# Altium PCB OSPLC2_2_STATUS.PcbDoc
Units mm, origin at the board's own origin, x right, y up, seen from the top; angles counter-clockwise.
Board outline 155 x 42 mm, 2 copper layers (Top Layer, Bottom Layer); 57 components, 59 nets, 160 pads, 36 vias.
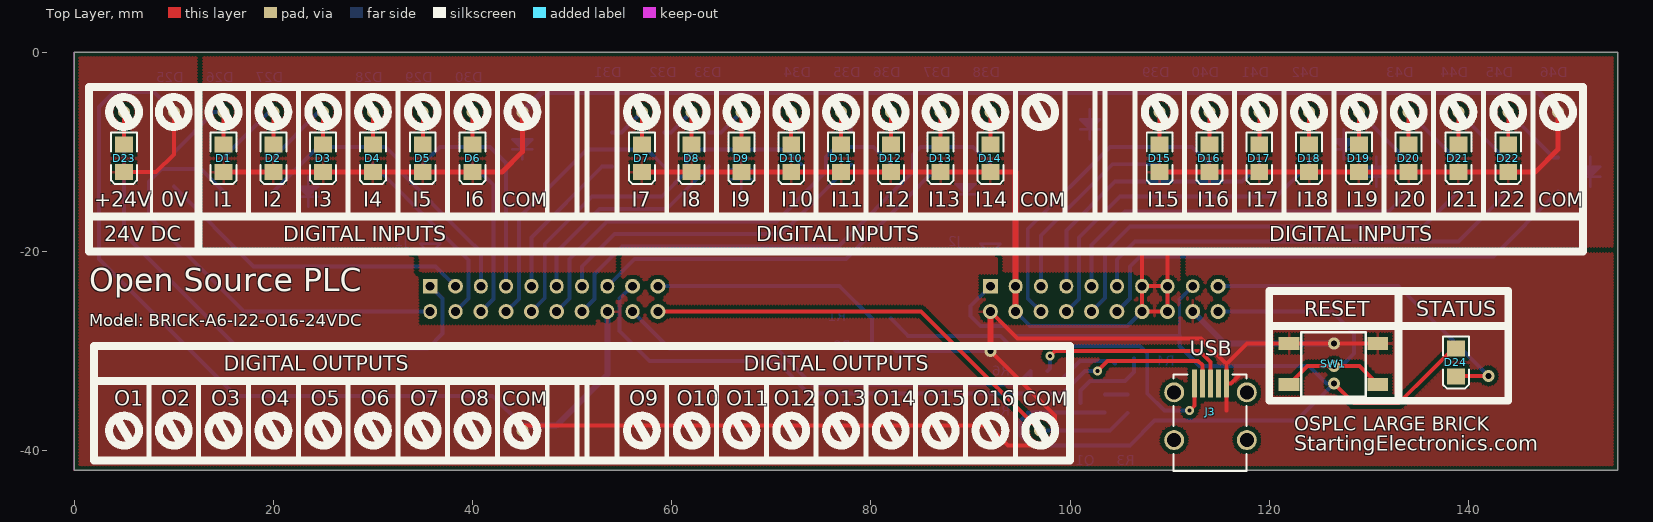
[diagram p0: Top Layer view]
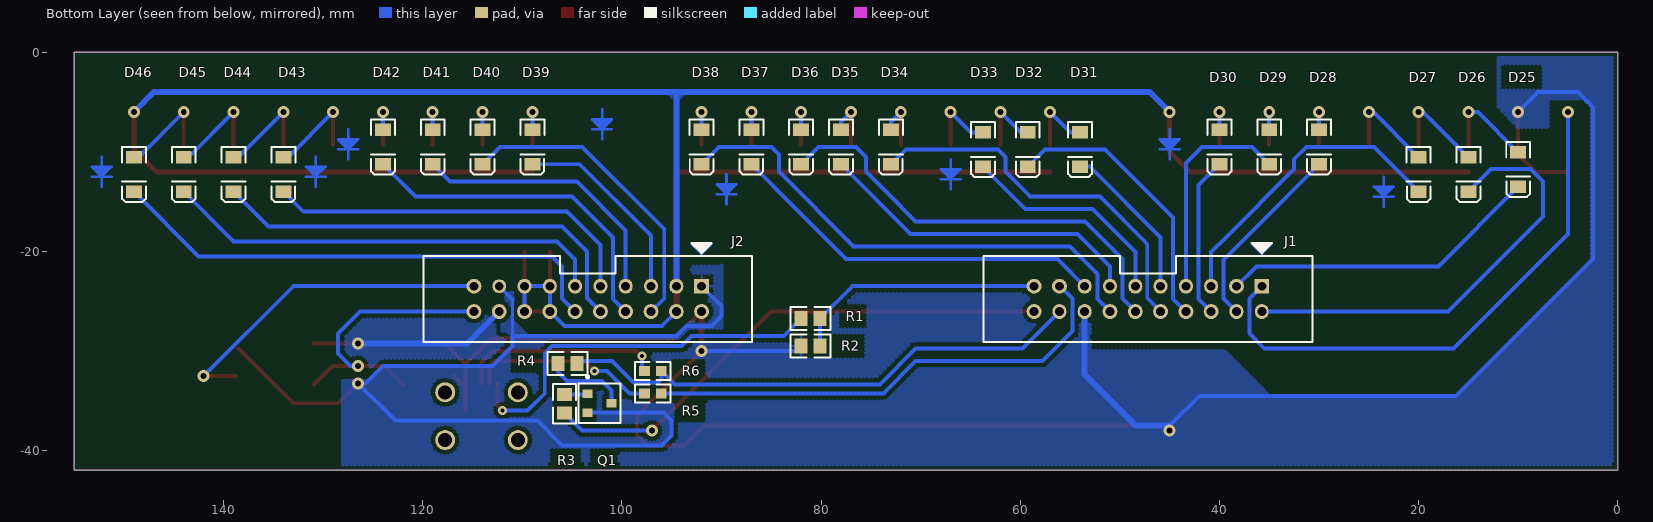
[diagram p1: Bottom Layer view, seen from below]

## Layer stack, top to bottom
Top Layer: signal copper 0.0356
Dielectric: dielectric 0.32, FR-4, Dk 4.8
Bottom Layer: signal copper 0.0356

## Board outline
0,-42 155,-42 155,0 0,0

## Design rules (kind name [scope] priority, off if disabled: settings)
Clearance [All] p1: gap=0.3
ComponentClearance [All] p1: gap=0.254 collisioncheckmode=0
HoleSize [All] p1: absolutevalues=TRUE maxlimit=5 minlimit=0.3 maxpercent=80.000 minpercent=20.000
PolygonConnect [All] p1: connectstyle=Relief reliefconductorwidth=0.254 reliefentries=4 polygonreliefangle="90 Angle"
RoutingLayers [All] p1: top layer=Horizontal bottom layer=Vertical
RoutingVias [All] p1: holewidth=0.6 width=1.2 viastyle="Through Hole" minholewidth=0.3 minwidth=0.6 maxholewidth=2 maxwidth=5
SolderMaskExpansion [All] p1: expansion=0.102
TestPointUsage [All] p1: valid=0 allowmultiple=FALSE
Testpoint [All] p1: side=15 testpointundercomponent=TRUE minsize=1.016 maxsize=2.54 preferedsize=1.524 minholesize=0 maxholesize=1.016 preferedholesize=0.813 testpointgrid=0.025 style=1023 order=1234567890
Width [All] p1: maxlimit=5 minlimit=0.2 preferedwidth=0.2 toplayer_prefwidth=0.4 bottomlayer_prefwidth=0.4 minimp=50.000000 maximp=50.000000 favimp=50.000000
15 further rules are at their usual default settings.

## Components (designator, comment, footprint, x,y, rotation, side; value= is the part's Value field where it differs from the comment)
D1 "LED" 1206_LED 15,-9.25 r270 top
D2 "LED" 1206_LED 20,-9.25 r270 top
D3 "LED" 1206_LED 25,-9.25 r270 top
D4 "LED" 1206_LED 30,-9.25 r270 top
D5 "LED" 1206_LED 35,-9.25 r270 top
D6 "LED" 1206_LED 40,-9.25 r270 top
D7 "LED" 1206_LED 57,-9.25 r270 top
D8 "LED" 1206_LED 62,-9.25 r270 top
D9 "LED" 1206_LED 67,-9.25 r270 top
D10 "LED" 1206_LED 72,-9.25 r270 top
D11 "LED" 1206_LED 77,-9.25 r270 top
D12 "LED" 1206_LED 82,-9.25 r270 top
D13 "LED" 1206_LED 87,-9.25 r270 top
D14 "LED" 1206_LED 92,-9.25 r270 top
D15 "LED" 1206_LED 109,-9.25 r270 top
D16 "LED" 1206_LED 114,-9.25 r270 top
D17 "LED" 1206_LED 119,-9.25 r270 top
D18 "LED" 1206_LED 124,-9.25 r270 top
D19 "LED" 1206_LED 129,-9.25 r270 top
D20 "LED" 1206_LED 134,-9.25 r270 top
D21 "LED" 1206_LED 139,-9.25 r270 top
D22 "LED" 1206_LED 144,-9.25 r270 top
D23 "LED" 1206_LED 5,-9.25 r270 top
D24 "LED" 1206_LED 138.75,-29.75 r270 top
D25 "8v2" MELF-R2/X1.6 10,-13.5 r0 bottom
D26 "8v2" MELF-R2/X1.6 15,-14 r0 bottom
D27 "8v2" MELF-R2/X1.6 20,-14 r0 bottom
D28 "8v2" MELF-R2/X1.6 30,-11.25 r0 bottom
D29 "8v2" MELF-R2/X1.6 35,-11.25 r0 bottom
D30 "8v2" MELF-R2/X1.6 40,-11.25 r0 bottom
D31 "8v2" MELF-R2/X1.6 54,-11.5 r0 bottom
D32 "8v2" MELF-R2/X1.6 59.25,-11.5 r0 bottom
D33 "8v2" MELF-R2/X1.6 63.75,-11.5 r0 bottom
D34 "8v2" MELF-R2/X1.6 73,-11.25 r0 bottom
D35 "8v2" MELF-R2/X1.6 78,-11.25 r0 bottom
D36 "8v2" MELF-R2/X1.6 82,-11.25 r0 bottom
D37 "8v2" MELF-R2/X1.6 87,-11.25 r0 bottom
D38 "8v2" MELF-R2/X1.6 92,-11.25 r0 bottom
D39 "8v2" MELF-R2/X1.6 109,-11.25 r0 bottom
D40 "8v2" MELF-R2/X1.6 114,-11.25 r0 bottom
D41 "8v2" MELF-R2/X1.6 119,-11.25 r0 bottom
D42 "8v2" MELF-R2/X1.6 124,-11.25 r0 bottom
D43 "8v2" MELF-R2/X1.6 134,-14 r0 bottom
D44 "8v2" MELF-R2/X1.6 139,-14 r0 bottom
D45 "8v2" MELF-R2/X1.6 144,-14 r0 bottom
D46 "8v2" MELF-R2/X1.6 149,-14 r0 bottom
J1 "IDC20M" IDC_20M_BOX#1 35.75,-23.5 r180 bottom
J2 "IDC20M" IDC_20M_BOX#2 92,-23.5 r180 bottom
J3 "USB-MINI-B" USB_MINI 112.5,-33.25 r0 top
Q1 "BC807-40" SO-G3/Y1 102.25,-35.25 r270 bottom
R1 "0805" 0805 82,-26.75 r180 bottom
R2 "0805" 0805 82,-29.5 r180 bottom
R3 "0805" 0805 105.75,-36.25 r90 bottom
R4 "0805" 0805 104.5,-31.25 r0 bottom
R5 "0603" 0603 97.75,-34.25 r180 bottom
R6 "0603" 0603 97.75,-32 r180 bottom
SW1 "DTSMW-66" DTSMW-66 122,-29.25 r0 top

## Footprints (in the part's own frame and the unit in brackets; to place one, negate y for a bottom-side part, rotate by r counter-clockwise, add the part's x,y. Pads: shape width x height; smd on the part's side, far side on the other; paste and mask are expansions set on the pad)
0603 [mm]
  rect 1.1x1 smd: 1(0,0) 2(1.7,0)
  silkscreen extent -0.95,-0.9 2.65,0.9
0805 [mm]
  rect 1.3x1.5 smd: 1(0,0) 2(1.9,0)
  silkscreen extent -1.05,-1.15 2.95,1.15
1206_LED [mm]
  rect 1.6x1.8 smd: 1(0,0) 2(2.8,0)
  silkscreen extent -1.2,-1.3 4,1.3
DTSMW-66 [mm] "Diptronics SMT switch, DTSMW-66"
  rect 2.1x1.3 smd: 1(0,0) 2(8.9,0) 3(0,-4.1) 4(8.9,-4.1)
  silkscreen extent 1.2,-5.35 7.7,1.15
IDC_20M_BOX#1 [mm]
  rect 1.5x1.5 hole 0.9: 1(0,0)
  oval 1.4x1.5 hole 0.9: 2(0,-2.54) 4(-2.54,-2.54) 5(-5.08,0) 7(-7.62,0) 9(-10.16,0) 11(-12.7,0) 13(-15.24,0) 15(-17.78,0) 16(-17.78,-2.54) 18(-20.32,-2.54)
  round 1.5 hole 0.9: 3(-2.54,0) 6(-5.08,-2.54) 8(-7.62,-2.54) 10(-10.16,-2.54) 12(-12.7,-2.54) 14(-15.24,-2.54) 17(-20.32,0) 19(-22.86,0) 20(-22.86,-2.54)
  silkscreen extent -27.94,-5.59 5.08,4.38
IDC_20M_BOX#2 [mm]
  rect 1.5x1.5 hole 0.9: 1(0,0)
  round 1.5 hole 0.9: 2(0,-2.54) 4(-2.54,-2.54) 6(-5.08,-2.54) 8(-7.62,-2.54) 10(-10.16,-2.54) 12(-12.7,-2.54) 14(-15.24,-2.54) 16(-17.78,-2.54) 18(-20.32,-2.54) 19(-22.86,0) 20(-22.86,-2.54)
  oval 1.4x1.5 hole 0.9: 3(-2.54,0) 5(-5.08,0) 7(-7.62,0) 9(-10.16,0) 11(-12.7,0) 13(-15.24,0) 15(-17.78,0)
  round 1.4 hole 0.9: 17(-20.32,0)
  silkscreen extent -27.94,-5.59 5.08,4.38
MELF-R2/X1.6 [mm] "Mini Melf Diode"
  rect 1.6x1.25 smd: 1(0,-3.45) 2(0,0)
  silkscreen extent -1.2,-4.47 1.2,1.03
SO-G3/Y1 [mm]
  rect 0.85x1 smd: 1(-0.95,-1.2) 2(0.95,-1.2) 3(0,1.2)
  silkscreen extent -2.77,-2.1 2,2.1
USB_MINI [mm] "Mini USB Connector"
  rect 0.5x2.8 smd: 1(0,0) 2(0.8,0) 3(1.6,0) 4(2.4,0) 5(3.2,0)
  round 2 hole 1.4: 6(-2.05,-0.9) 7(5.25,-0.9) 8(-2.05,-5.7) 9(5.25,-5.7)
  silkscreen extent -2.1,-8.8 5.2,0.9

## Part data
D1 D2 D3 D4 D5 D6 D7 D8 D9 D10 D11 D12 D13 D14 D15 D16 D17 D18 D19 D20 D21 D22 D23 D24: library part LED_1206, "1206 footpring LED"
D25 D26 D27 D28 D29 D30 D31 D32 D33 D34 D35 D36 D37 D38 D39 D40 D41 D42 D43 D44 D45 D46: library part BZV55C, "SMT Zenter Diode"
J1 J2: library part IDC_20M, "20 pin IDC male connector, vertical, box"
J3: "USB Miniature Type B Connector"
Q1: "PNP General Purpose Amplifier"
R1 R2 R3 R4: library part RES_0805, "0805 footprint resistor"
R5 R6: library part RES_0603, "0603 footprint resistor"
SW1: library part PB_SWITCH_DTSMW-66, "Diptronics SMT Tactile Push Button Switch"

## Via types
v1: diameter 1.2, hole 0.6, Top Layer to Bottom Layer, 33 vias
v2: diameter 0.9, hole 0.4, Top Layer to Bottom Layer, 3 vias

## Nets (pads, with @x,y where several pads share a name; then routed paths per layer and width w, separated by ;. In a path a pad name is that pad's centre, name@x,y a point inside that pad or via, vN(x,y) a via of type N, cw(c..) or ccw(c..) an arc to the next point about the centre after c; other vN are vias at no path point)
DDM: J1.17 R5.2 | length 48.9
  Bottom Layer w0.4: J1.17@56,-23.5 54.75,-24.75 54.75,-28 54.8,-28.05 55.551,-28.801 57.75,-31 70.5,-31 73.75,-34.25 R5.2
DDP: J1.18 R4.1 R6.2 | length 54
  Bottom Layer w0.4: J1.18 59.78,-29.75 70.5,-29.75 74.1,-33.35 94.7,-33.35 R6.2 96.05,-32.8 96.396,-33.146 98.854,-33.146 99.5,-32.5 100.773,-31.227 101,-31 104.25,-31 R4.1
GND: D23.2 J1.16 J2.2 J2.18 J3.5 R2.1 SW1.1 SW1.2 | length 244.4
  Top Layer w0.4: D23.2 8.2,-12.05 10,-10.25 v1(10,-6) ; v1@45,-37.5 91.75,-37.5 93.75,-39.5 97.5,-39.5 98.5,-38.5 98.5,-36.5 v1(92,-30) ; J2.2 94.71,-28.75 113.15,-28.75 115.7,-31.3 ; 115.7,-36 115.7,-31.3 ; J3.5 116.15,-33.25 116.9,-32.5 ; SW1.2 SW1.1 117.75,-29.25 115.7,-31.3
  Top Layer w0.6: v1(92,-30) J2.2
  Bottom Layer w0.4: v1(10,-6) 8,-4 4,-4 2.5,-5.5 2.5,-20.75 16.25,-34.5 42,-34.5 v1@45,-37.5 ; R2.1 82.5,-30 v1(92,-30)
  Bottom Layer w0.6: v1@45,-37.5 48.4,-37.5 53.53,-32.37 J1.16 ; J2.18 115.53,-29.25 v1(126.5,-29.25)
  other v1: 45,-38
I_LED1: D25.2 J1.3 | length 32.4
  Bottom Layer w0.4: D25.2 18,-21.5 36.29,-21.5 J1.3
I_LED2: D26.2 J1.2 | length 44.7
  Bottom Layer w0.4: D26.2 12.75,-11.75 8.75,-11.75 7.5,-13 7.5,-16.5 17.04,-26.04 J1.2
I_LED3: D27.2 J1.5 | length 31.1
  Bottom Layer w0.4: D27.2 24.5,-9.5 31.25,-9.5 32.5,-10.75 32.5,-11.75 39.355,-18.604 40.83,-20.08 J1.5
I_LED4: D28.2 J1.4 | length 19.3
  Bottom Layer w0.4: D28.2 36.534,-17.784 39.6,-20.85 39.6,-24.73 J1.4
I_LED5: D29.2 J1.7 | length 22.1
  Bottom Layer w0.4: D29.2 36.75,-9.5 41.75,-9.5 43.37,-11.12 J1.7
I_LED6: D30.2 J1.6 | length 16.2
  Bottom Layer w0.4: D30.2 42.1,-13.35 42.1,-24.77 J1.6
I_LED7: D31.2 J1.9 | length 15.9
  Bottom Layer w0.4: J1.9 45.91,-18.59 53,-11.5 D31.2
I_LED8: D32.2 J1.8 | length 28.1
  Bottom Layer w0.4: J1.8 44.65,-24.76 44.65,-16.6 51.5,-9.75 57.5,-9.75 D32.2
I_LED9: D33.2 J1.11 | length 22.3
  Bottom Layer w0.4: J1.11 48.45,-20.05 52.75,-15.75 59.5,-15.75 D33.2
I_LED10: D34.2 J1.10 | length 38.5
  Bottom Layer w0.4: J1.10 47.25,-24.7 47.25,-19.25 52,-14.5 59,-14.5 61.5,-12 61.5,-10.5 62.25,-9.75 71.5,-9.75 D34.2
I_LED11: D35.2 J1.13 | length 33.2
  Bottom Layer w0.4: J1.13 50.99,-21.51 54.25,-18.25 71,-18.25 D35.2
I_LED12: D36.2 J1.12 | length 44.3
  Bottom Layer w0.4: J1.12 49.75,-24.74 49.75,-20.75 53.5,-17 70.5,-17 73.347,-14.153 75.5,-12 75.5,-10.5 76.5,-9.5 80.25,-9.5 D36.2
I_LED13: D37.2 J1.15 | length 38.5
  Bottom Layer w0.4: J1.15 56.262,-20.768 77.482,-20.768 82.75,-15.5 D37.2
I_LED14: D38.2 J1.14 | length 51.1
  Bottom Layer w0.4: J1.14 52.25,-24.78 52.25,-22.25 55,-19.5 76.75,-19.5 84.25,-12 84.25,-10.25 85,-9.5 90.25,-9.5 D38.2
I_LED15: D39.2 J2.5 | length 20.1
  Bottom Layer w0.4: J2.5@97,-23.42 J2.5 97.08,-18.42 104.25,-11.25 D39.2
I_LED16: D40.2 J2.6 | length 31.2
  Bottom Layer w0.4: J2.6 95.75,-24.71 95.75,-17.75 104,-9.5 112.25,-9.5 D40.2
I_LED17: D41.2 J2.7 | length 27.7
  Bottom Layer w0.4: J2.7 99.62,-17.88 104.5,-13 117.25,-13 D41.2
I_LED18: D42.2 J2.8 | length 34.1
  Bottom Layer w0.4: J2.8 100.9,-24.76 100.9,-18.6 105,-14.5 120.75,-14.5 D42.2
I_LED19: D43.2 J2.9 | length 38.2
  Bottom Layer w0.4: J2.9 102.16,-19.34 105.5,-16 132,-16 D43.2
I_LED20: D44.2 J2.10 | length 44.6
  Bottom Layer w0.4: J2.10 103.5,-24.7 103.5,-20 106,-17.5 135.5,-17.5 D44.2
I_LED21: D45.2 J2.11 | length 44.8
  Bottom Layer w0.4: J2.11 104.7,-20.8 106.5,-19 139,-19 D45.2
I_LED22: D46.2 J2.12 | length 51.2
  Bottom Layer w0.4: J2.12 106,-24.74 106,-21.5 107,-20.5 142.5,-20.5 D46.2
IN_GND: D1.2 D2.2 D3.2 D4.2 D5.2 D6.2 D7.2 D8.2 D9.2 D10.2 D11.2 D12.2 D13.2 D14.2 D15.2 D16.2 D17.2 D18.2 D19.2 D20.2 D21.2 D22.2 J2.3 J2.4 J2.13 J2.14 J2.15 J2.16 | length 294.9
  Top Layer w0.4: 107.2,-20 107.24,-20.04 J2.14 J2.16 J2.15 ; J2.13 J2.15 ; 109.8,-20 109.8,-23.48 J2.15
  Top Layer w0.5: D1.2 42.95,-12.05 45,-10 v1(45,-6) ; D7.2 94.5,-12.05 ; D15.2 146.7,-12.05 149,-9.75 v1(149,-6)
  Top Layer w0.6: 94.5,-12.05 94.5,-23.46 J2.3 J2.4
  Bottom Layer w0.4: J2.4 96,-27.5 105.78,-27.5 J2.14 J2.13 J2.15 J2.16
  Bottom Layer w0.6: v1(45,-6) 47,-4 147,-4 v1(149,-6) ; J2.3 94.54,-4.04
LED24A: D23.1 J1.1 | length 58.2
  Top Layer w0.4: D23.1 v1(5,-6)
  Bottom Layer w0.4: v1(5,-6) 5,-18.25 16.5,-29.75 35.5,-29.75 37,-28.25 37,-24.75 J1.1
NetD1_1: D1.1 D25.1 | length 9.9
  Top Layer w0.4: D1.1 v1(15,-6)
  Bottom Layer w0.4: D25.1 14.05,-6 v1(15,-6)
NetD2_1: D2.1 D26.1 | length 10.1
  Top Layer w0.4: D2.1 v1(20,-6)
  Bottom Layer w0.4: D26.1 19.55,-6 v1(20,-6)
NetD3_1: D3.1 D27.1 | length 10.1
  Top Layer w0.4: D3.1 v1(25,-6)
  Bottom Layer w0.4: D27.1 24.55,-6 v1(25,-6)
NetD4_1: D4.1 D28.1 | length 5
  Top Layer w0.4: D4.1 v1(30,-6)
  Bottom Layer w0.4: D28.1 v1(30,-6)
NetD5_1: D5.1 D29.1 | length 5
  Top Layer w0.4: D5.1 v1(35,-6)
  Bottom Layer w0.4: D29.1 v1(35,-6)
NetD6_1: D6.1 D30.1 | length 5
  Top Layer w0.4: D6.1 v1(40,-6)
  Bottom Layer w0.4: D30.1 v1(40,-6)
NetD7_1: D7.1 D31.1 | length 7.1
  Top Layer w0.4: D7.1 v1(57,-6)
  Bottom Layer w0.4: D31.1 54.95,-8.05 v1(57,-6)
NetD8_1: D8.1 D32.1 | length 6.8
  Top Layer w0.4: D8.1 v1(62,-6)
  Bottom Layer w0.4: D32.1 59.95,-8.05 v1(62,-6)
NetD9_1: D9.1 D33.1 | length 7.3
  Top Layer w0.4: D9.1 v1(67,-6)
  Bottom Layer w0.4: D33.1 64.95,-8.05 v1(67,-6)
NetD10_1: D10.1 D34.1 | length 5.5
  Top Layer w0.4: D10.1 v1(72,-6)
  Bottom Layer w0.4: v1(72,-6) 73,-7 D34.1
NetD11_1: D11.1 D35.1 | length 5.5
  Top Layer w0.4: D11.1 v1(77,-6)
  Bottom Layer w0.4: v1(77,-6) 78,-7 D35.1
NetD12_1: D12.1 D36.1 | length 5
  Top Layer w0.4: D12.1 v1(82,-6)
  Bottom Layer w0.4: D36.1 v1(82,-6)
NetD13_1: D13.1 D37.1 | length 5
  Top Layer w0.4: D13.1 v1(87,-6)
  Bottom Layer w0.4: D37.1 v1(87,-6)
NetD14_1: D14.1 D38.1 | length 5
  Top Layer w0.4: D14.1 v1(92,-6)
  Bottom Layer w0.4: D38.1 v1(92,-6)
NetD15_1: D15.1 D39.1 | length 5
  Top Layer w0.4: D15.1 v1(109,-6)
  Bottom Layer w0.4: D39.1 v1(109,-6)
NetD16_1: D16.1 D40.1 | length 5
  Top Layer w0.4: D16.1 v1(114,-6)
  Bottom Layer w0.4: D40.1 v1(114,-6)
NetD17_1: D17.1 D41.1 | length 5
  Top Layer w0.4: D17.1 v1(119,-6)
  Bottom Layer w0.4: D41.1 v1(119,-6)
NetD18_1: D18.1 D42.1 | length 5
  Top Layer w0.4: D18.1 v1(124,-6)
  Bottom Layer w0.4: D42.1 v1(124,-6)
NetD19_1: D19.1 D43.1 | length 10.1
  Top Layer w0.4: D19.1 v1(129,-6)
  Bottom Layer w0.4: v1(129,-6) 133.55,-10.55 D43.1
NetD20_1: D20.1 D44.1 | length 10.1
  Top Layer w0.4: D20.1 v1(134,-6)
  Bottom Layer w0.4: v1(134,-6) 138.55,-10.55 D44.1
NetD21_1: D21.1 D45.1 | length 10.1
  Top Layer w0.4: D21.1 v1(139,-6)
  Bottom Layer w0.4: v1(139,-6) 143.55,-10.55 D45.1
NetD22_1: D22.1 D46.1 | length 10.1
  Top Layer w0.4: D22.1 v1(144,-6)
  Bottom Layer w0.4: v1(144,-6) 148.55,-10.55 D46.1
NetJ3_1: J3.1 R1.1 | length 39.1
  Top Layer w0.4: v2(112,-36) 112.5,-35.5 J3.1
  Bottom Layer w0.4: R1.1 83.75,-28.5 93,-28.5 94,-29.5 107,-29.5 107.75,-30.25 107.75,-34.25 109.5,-36 v2(112,-36)
NetQ1_1: Q1.1 R3.2 | length 2.3
  Bottom Layer w0.4: Q1.1@103.5,-34.35 R3.2
NetQ1_3: Q1.3 R4.2 | length 8.8
  Bottom Layer w0.4: Q1.3 101.05,-33.95 102,-33 105.5,-33 106.4,-32.1 R4.2@106.4,-30.75
NRST: J2.20 SW1.3 SW1.4 | length 29.5
  Top Layer w0.4: SW1.3 123.85,-31.5 129.05,-31.5 SW1.4
  Bottom Layer w0.4: J2.20 126.29,-26.04 128.5,-28.25 128.5,-30.25 127.25,-31.5 v1(126.5,-31.5)
S_LED1: D24.2 J2.19 | length 34.1
  Top Layer w0.4: D24.2 138.8,-32.5 v1(142,-32.5)
  Bottom Layer w0.4: J2.19 133,-23.5 v1(142,-32.5)
USB_DET: J1.19 R1.2 R2.2 | length 25.6
  Bottom Layer w0.4: J1.19 76.85,-23.5 R1.2 R2.2
USB_DM: J3.2 R5.1 | length 18.9
  Top Layer w0.4: v2(102.75,-32) 103.75,-31 112.869,-31 113.3,-31.431 J3.2
  Bottom Layer w0.4: R5.1 99.25,-34.25 101.5,-32 v2(102.75,-32)
USB_DP: J3.3 R6.1 | length 20.5
  Top Layer w0.4: v2(98,-30.5) 98.5,-30 113,-30 114.1,-31.1 J3.3
  Bottom Layer w0.4: R6.1 98,-31.75 v2(98,-30.5)
USB_PUP: J1.20 R3.1 | length 52.8
  Top Layer w0.4: J1.20 85.04,-26.04 v1(97,-38)
  Bottom Layer w0.4: v1(97,-38) 104,-38 R3.1
VCC3V3: D24.1 J2.1 J2.17 Q1.2 | length 109.2
  Top Layer w0.4: v1(126.5,-33.25) 128.5,-35.25 133,-35.25 136.25,-32 D24.1@138.5,-29.75
  Bottom Layer w0.3: 111,-28.5 111,-24.82
  Bottom Layer w0.4: J2.1 90,-25.5 90,-26.5 91,-27.5 93.5,-27.5 94.5,-28.5 111,-28.5 ; Q1.2 95.8,-36.2 95,-37 95,-38.5 96,-39.5 106,-39.5 108.5,-37 122.75,-37 v1(126.5,-33.25) 125.75,-33.25 124,-31.5 113,-31.5 111,-29.5 111,-28.45 ; 111,-24.82 J2.17
pads on no net: J3.4 J3.6 J3.7 J3.8 J3.9
copper on no net: | length 99.6
  Bottom Layer w0.254: 22.5,-14.5 24.5,-14.5 ; 23,-13.75 23.5,-14.25 24,-13.75 ; 23.5,-15.5 23.5,-12.5 ; 44,-9.75 46,-9.75 ; 44.5,-9 45,-9.5 45.5,-9 ; 45,-10.75 45,-7.75 ; 66,-12.75 68,-12.75 ; 66.5,-12 67,-12.5 67.5,-12 ; 67,-13.75 67,-10.75 ; 88.5,-14.25 90.5,-14.25 ; 89,-13.5 89.5,-14 90,-13.5 ; 89.5,-15.25 89.5,-12.25 ; 101,-7.75 103,-7.75 ; 101.5,-7 102,-7.5 102.5,-7 ; 102,-8.75 102,-5.75 ; 126.5,-9.75 128.5,-9.75 ; 127,-9 127.5,-9.5 128,-9 ; 127.5,-10.75 127.5,-7.75 ; 129.75,-12.5 131.75,-12.5 ; 130.25,-11.75 130.75,-12.25 131.25,-11.75 ; 130.75,-13.5 130.75,-10.5 ; 151.25,-12.5 153.25,-12.5 ; 151.75,-11.75 152.25,-12.25 152.75,-11.75 ; 152.25,-13.5 152.25,-10.5 ; 22.5,-13.5 23.5,-14.5 24.5,-13.5 22.5,-13.5 ; 34.75,-19.25 36.75,-19.25 35.75,-20.25 34.75,-19.25 ; 44,-8.75 45,-9.75 46,-8.75 44,-8.75 ; 66,-11.75 67,-12.75 68,-11.75 66,-11.75 ; 88.5,-13.25 89.5,-14.25 90.5,-13.25 88.5,-13.25 ; 91,-19.25 93,-19.25 92,-20.25 91,-19.25 ; 101,-6.75 102,-7.75 103,-6.75 101,-6.75 ; 126.5,-8.75 127.5,-9.75 128.5,-8.75 126.5,-8.75 ; 129.75,-11.5 130.75,-12.5 131.75,-11.5 129.75,-11.5 ; 151.25,-11.5 152.25,-12.5 153.25,-11.5 151.25,-11.5

## Polygon pours and split planes (outlines as drawn)
IN_GND on Top Layer (hatched 90Degree grid 0 track 0.3, remove dead copper): 154.5,-0.5 154.5,-19.5 111,-19.5 111,-26.5 106.5,-26.5 106.5,-22 93,-22 93,-19.5 54.5,-19.5 54.5,-22 34,-22 34,-19.5 13,-19.5 13,-0.5
GND on Top Layer (hatched 90Degree grid 0 track 0.3, remove dead copper): 13,-0.5 0.5,-0.5 0.5,-41.5 154.5,-41.5 154.5,-19.5 111,-19.5 111,-27.5 93,-27.5 93,-19.8 55,-19.8 55,-25 52.5,-25 52.5,-27.5 34.5,-27.5 34.5,-20 13,-20
GND on Bottom Layer (hatched 90Degree grid 0 track 0.4, remove dead copper): 7.5,-7.5 10,-7.5 12,-5.5 12,-0.5 0.5,-0.5 0.5,-41.5 131,-41.5 131,-25.5 111.093,-25.5 111.093,-27.8 93.016,-27.8 93.016,-24.8 88.5,-24.8 88.5,-22 56.5,-22 55.5,-23 55.5,-25 53,-25 53,-30 39.5,-30 35,-34.5 16.25,-34.5 2.633,-20.883 2.633,-5.5 3.5,-4.633 7,-4.633 7,-7.5
VCC3V3 on Bottom Layer (hatched 90Degree grid 0 track 0.4, remove dead copper): 90,-21.5 93,-21.5 93,-27 94.5,-28.5 109.5,-28.5 111,-27 111,-22.5 113.5,-22.5 113.5,-31.5 124,-31.5 125.5,-33 128,-33 128,-41.5 90,-41.5 90,-21.5
IN_GND on Bottom Layer (hatched 90Degree grid 0 track 0.3, remove dead copper): 94.54,-5 95.5,-4.04 93.5,-4.04

## Keep-outs
Keep-Out Layer:
  the board outline again, w0

## Other copper
Bottom Layer:
  rectangle: 101.5,-7.25 102.5,-6.75
  rectangle: 101.25,-7 102.75,-6.75
  rectangle: 151.75,-12 152.75,-11.5
  rectangle: 151.5,-11.75 153,-11.5
  rectangle: 130.25,-12 131.25,-11.5
  rectangle: 130,-11.75 131.5,-11.5
  rectangle: 127,-9.25 128,-8.75
  rectangle: 126.75,-9 128.25,-8.75
  rectangle: 89,-13.75 90,-13.25
  rectangle: 88.75,-13.5 90.25,-13.25
  rectangle: 66.5,-12.25 67.5,-11.75
  rectangle: 66.25,-12 67.75,-11.75
  rectangle: 44.5,-9.25 45.5,-8.75
  rectangle: 44.25,-9 45.75,-8.75
  rectangle: 23,-14 24,-13.5
  rectangle: 22.75,-13.75 24.25,-13.5
  text "D31" at 55,-2.5 h1
  text "D32" at 60.5,-2.5 h1
  text "D33" at 65,-2.5 h1
  text "D34" at 74,-2.5 h1
  text "D35" at 79,-2.5 h1
  text "D36" at 83,-2.5 h1
  text "D37" at 88,-2.5 h1
  text "D38" at 93,-2.5 h1
  text "D39" at 110,-2.5 h1
  text "D40" at 115,-2.5 h1
  text "D41" at 120,-2.5 h1
  text "D42" at 125,-2.5 h1
  text "D43" at 134.5,-2.5 h1
  text "D44" at 140,-2.5 h1
  text "D45" at 144.5,-2.5 h1
  text "D46" at 150,-2.5 h1
  text "D25" at 11,-3 h1
  text "D26" at 16,-3 h1
  text "D27" at 21,-3 h1
  text "D28" at 31,-3 h1
  text "D29" at 36,-3 h1
  text "D30" at 41,-3 h1
  text "J1" at 33.5,-19.5 h1
  text "J2" at 89,-19.5 h1
  text "R1" at 77.5,-27 h1
  text "R2" at 78,-30 h1
  text "R4" at 110.5,-31.5 h1
  text "R6" at 94,-32.5 h1
  text "R5" at 94,-36.5 h1
  text "Q1" at 102.5,-41.5 h1
  text "R3" at 106.5,-41.5 h1

## Silkscreen, mask and mechanical layers (free items; w line width, h text height)
Top Overlay:
  drawing of 181 lines, arcs and shapes, not listed
  text "+24V" at 2,-15.5 h1.5
  text "0V" at 8.75,-15.5 h1.5
  text "I1" at 14,-15.5 h1.5
  text "I2" at 19,-15.5 h1.5
  text "I3" at 24,-15.5 h1.5
  text "I4" at 29,-15.5 h1.5
  text "I5" at 34,-15.5 h1.5
  text "I6" at 39.25,-15.5 h1.5
  text "COM" at 43,-15.5 h1.4
  text "I7" at 56,-15.5 h1.5
  text "I8" at 61,-15.5 h1.5
  text "I9" at 66,-15.5 h1.5
  text "I10" at 71,-15.5 h1.5
  text "I11" at 76,-15.5 h1.5
  text "I12" at 80.75,-15.5 h1.5
  text "I13" at 85.75,-15.5 h1.5
  text "I14" at 90.5,-15.5 h1.5
  text "COM" at 95,-15.5 h1.4
  text "I15" at 107.75,-15.5 h1.5
  text "I16" at 112.75,-15.5 h1.5
  text "I17" at 117.75,-15.5 h1.5
  text "I18" at 122.75,-15.5 h1.5
  text "I19" at 127.75,-15.5 h1.5
  text "I20" at 132.5,-15.5 h1.5
  text "I21" at 137.75,-15.5 h1.5
  text "I22" at 142.5,-15.5 h1.5
  text "COM" at 147,-15.5 h1.4
  text "24V DC" at 3,-19 h1.5
  text "DIGITAL INPUTS" at 21,-19 h1.5
  text "DIGITAL INPUTS" at 68.5,-19 h1.5
  text "DIGITAL INPUTS" at 120,-19 h1.5
  text "Open Source PLC" at 1.5,-24 h2.3
  text "RESET" at 123.5,-26.5 h1.5
  text "STATUS" at 134.75,-26.5 h1.5
  text "Model: BRICK-A6-I22-O16-24VDC" at 1.5,-27.5 h1.2
  text "USB" at 112,-30.5 h1.5
  text "DIGITAL OUTPUTS" at 15,-32 h1.5
  text "DIGITAL OUTPUTS" at 67.25,-32 h1.5
  text "O1" at 4,-35.5 h1.5
  text "O2" at 8.75,-35.5 h1.5
  text "O3" at 13.75,-35.5 h1.5
  text "O4" at 18.75,-35.5 h1.5
  text "O5" at 23.75,-35.5 h1.5
  text "O6" at 28.75,-35.5 h1.5
  text "O7" at 33.75,-35.5 h1.5
  text "O8" at 38.75,-35.5 h1.5
  text "COM" at 43,-35.5 h1.4
  text "O9" at 55.75,-35.5 h1.5
  text "O10" at 60.5,-35.5 h1.5
  text "O11" at 65.5,-35.5 h1.5
  text "O12" at 70.25,-35.5 h1.5
  text "O13" at 75.25,-35.5 h1.5
  text "O14" at 80.25,-35.5 h1.5
  text "O15" at 85.25,-35.5 h1.5
  text "O16" at 90.25,-35.5 h1.5
  text "COM" at 95.25,-35.5 h1.4
  text "OSPLC LARGE BRICK" at 122.5,-38 h1.4
  text "StartingElectronics.com" at 122.5,-40 h1.5
Drill Drawing:
  text ".LEGEND" at 159.08,-36.92 h1.52
  text "Drill Drawing." at 159.08,-39.46 h1.52

## Dimensions
0,-42 to 0,0 on Mechanical 1
0,-42 to 155,-42 on Mechanical 1